# Altium PCB 28pins_PCB.PcbDoc (part 1 of 3)
Units mm, origin at the board's own origin, x right, y up, seen from the top; angles counter-clockwise.
Board outline 68.58 x 53.34 mm, 2 copper layers (L1, L2), stack 1.671 mm thick; 105 components, 73 nets, 323 pads, 83 vias.
Unrouted connection lines stored in the file: 1.
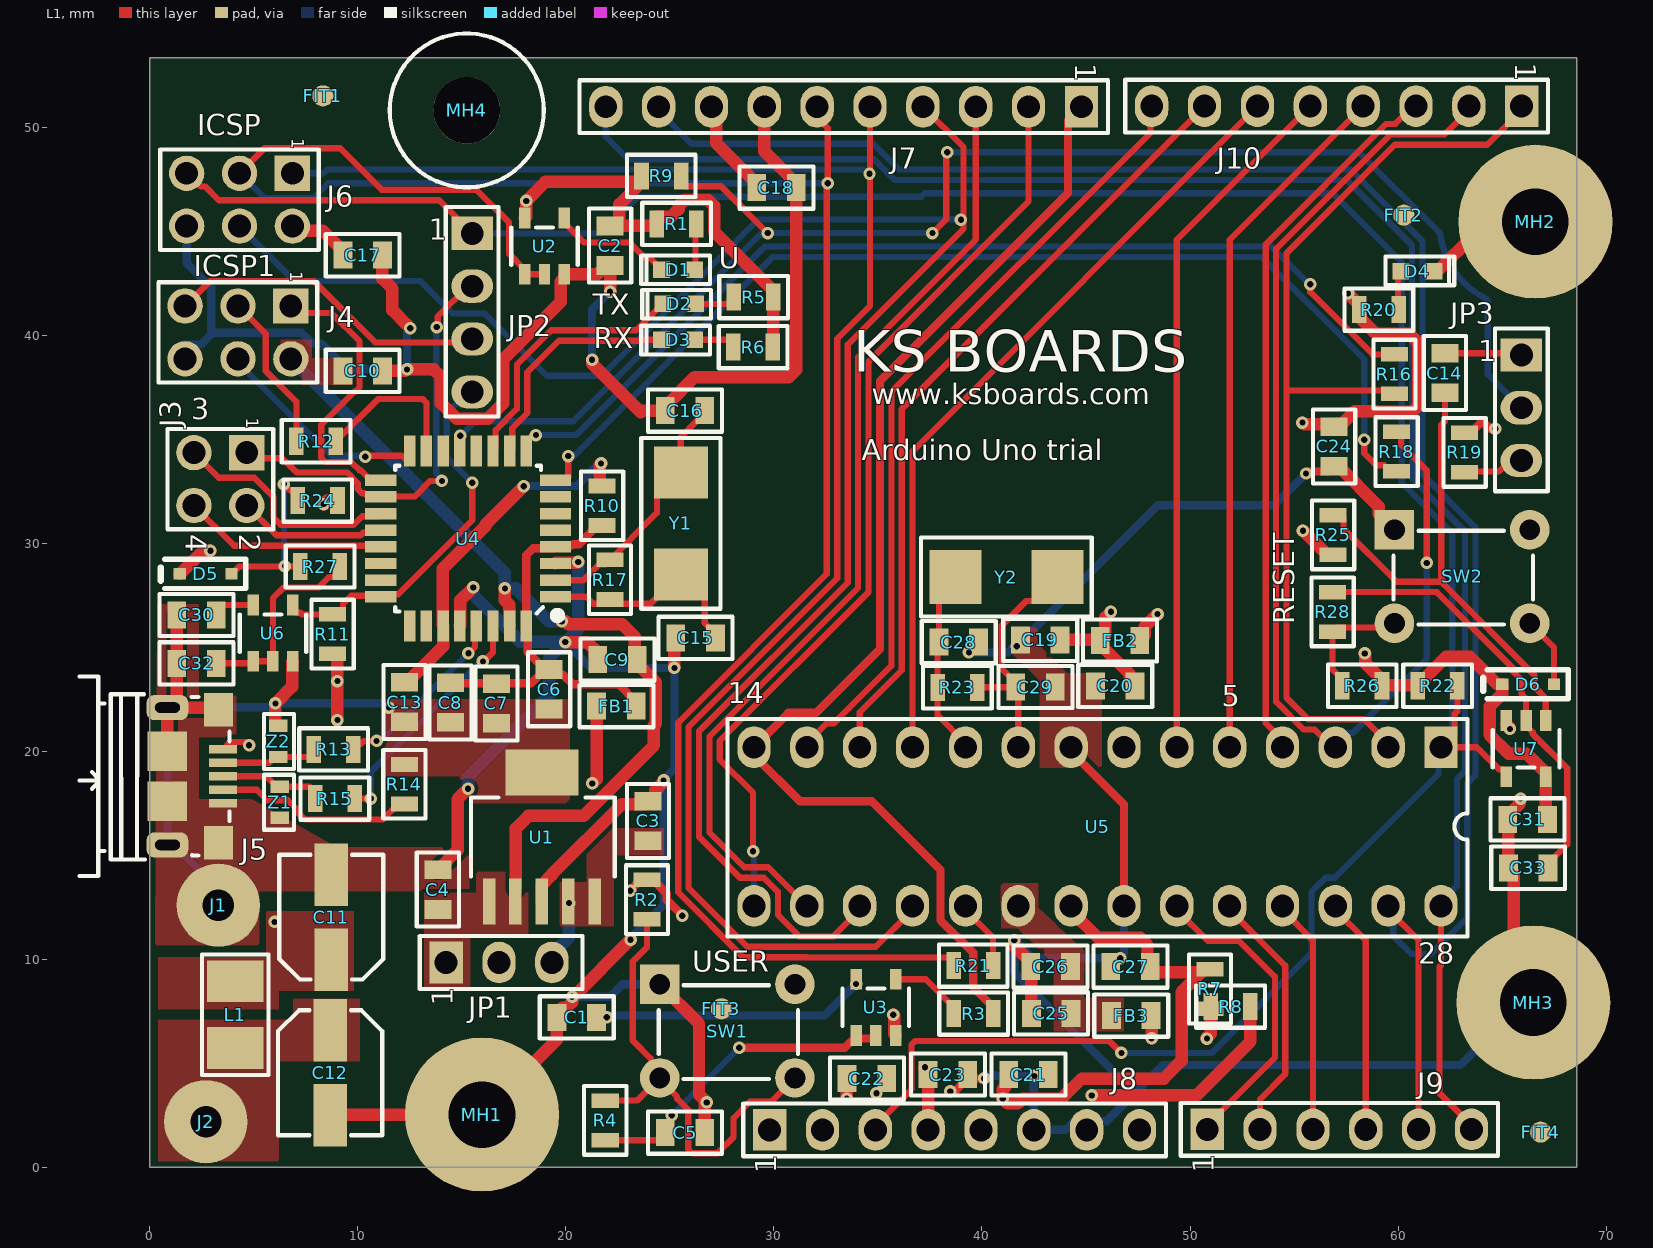
[diagram p0: L1 view]
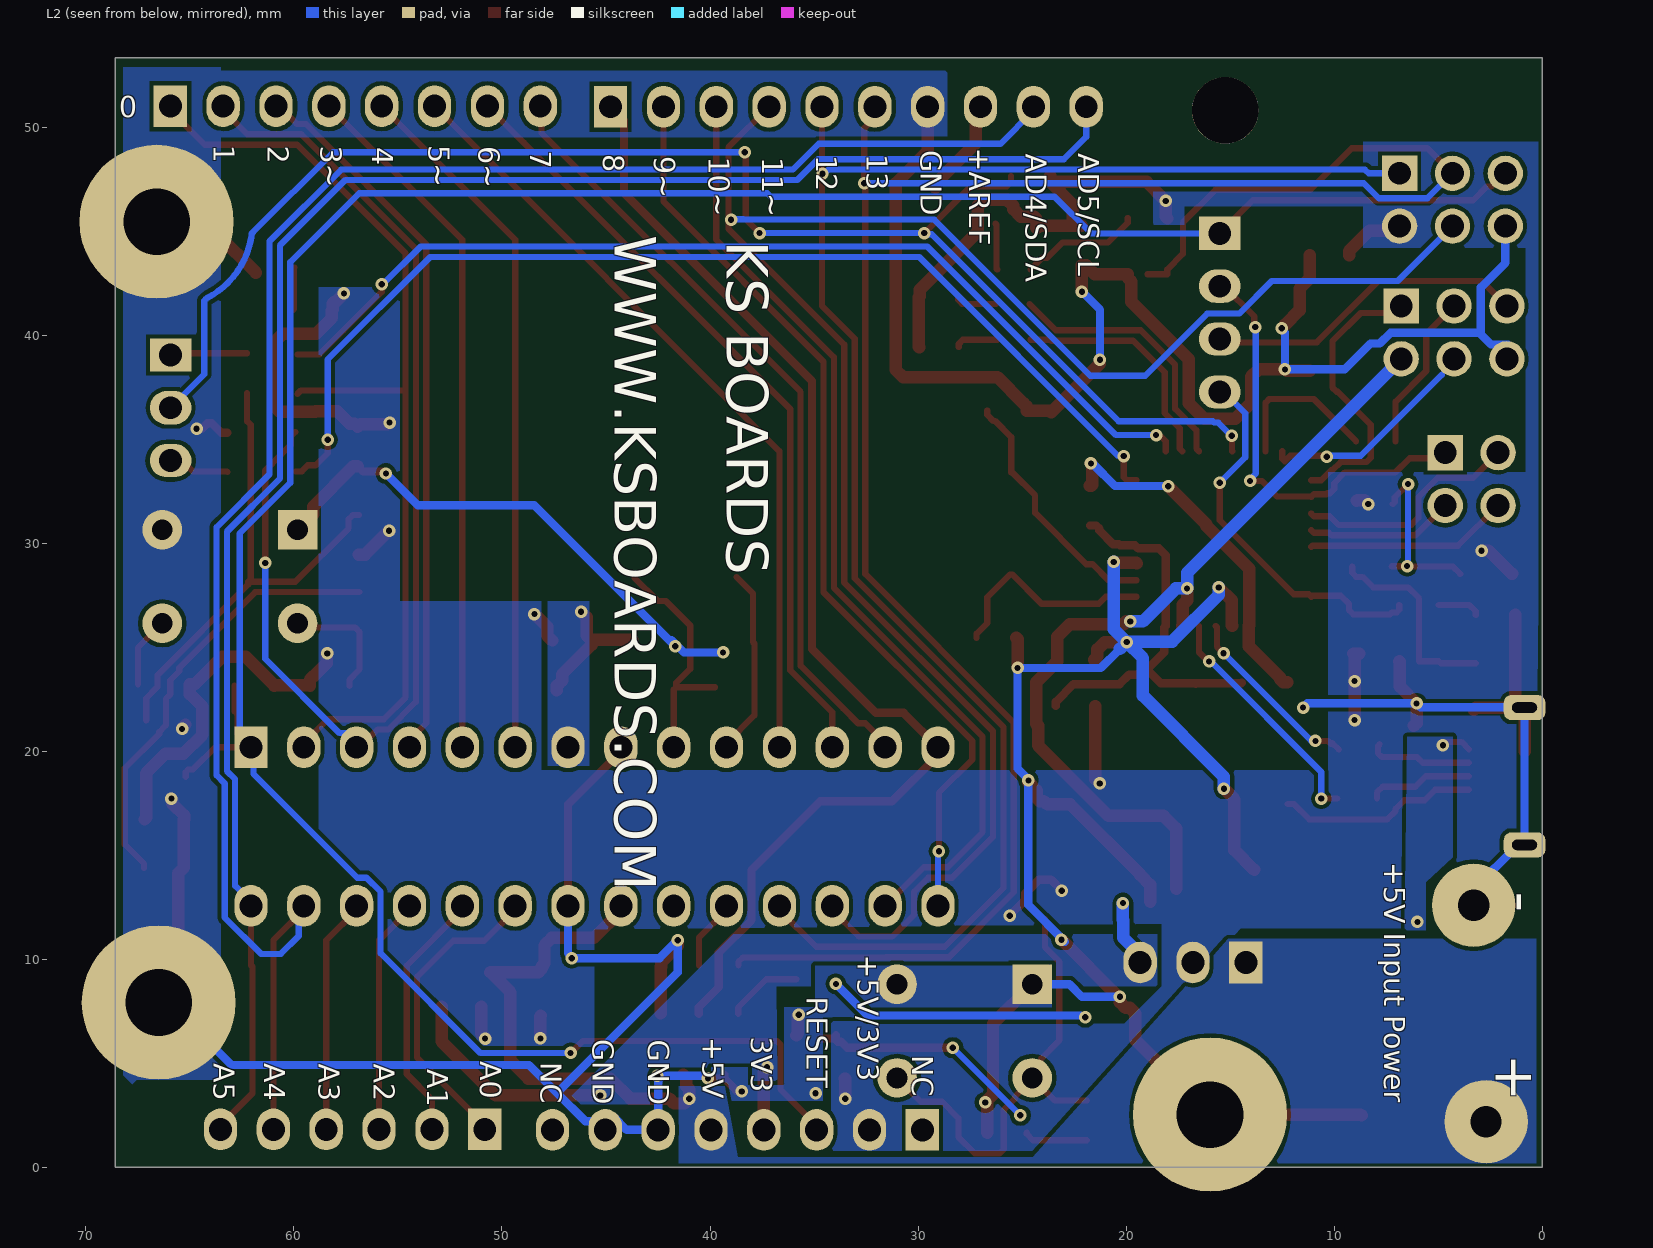
[diagram p1: L2 view, seen from below]

## Layer stack, top to bottom
Top Solder: solder mask 0.0102, Solder Resist, Dk 3.5
L1: signal copper 0.0356
Dielectric 1: dielectric 1.6, FR-4, Dk 4.8
L2: signal copper 0.0356
Bottom Solder: solder mask 0.0102, Solder Resist, Dk 3.5

## Board outline
0,0 68.58,0 68.58,53.34 0,53.34

## Design rules (kind name [scope] priority, off if disabled: settings)
Clearance [All] p1: gap=0.2 ignorepadtopadclearanceinfootprint=FALSE
ComponentClearance [All] p1: gap=0.2 collisioncheckmode=3 verticalgap=0.2 showdistances=FALSE
HoleSize [All] p1: absolutevalues=TRUE maxlimit=10 minlimit=0.2 maxpercent=80.000 minpercent=20.000
HoleToHoleClearance [All] p1: gap=0.3 allowstackedmicrovias=TRUE
MinimumSolderMaskSliver [All] p1: minsoldermaskwidth=0.1
PolygonConnect [All] p1: connectstyle=Direct reliefconductorwidth=0.254 reliefentries=4 polygonreliefangle="90 Angle" airgapwidth=0.254
RoutingVias [All] p1: holewidth=0.3 width=0.6 viastyle="Through Hole" minholewidth=0.3 minwidth=0.6 maxholewidth=0.3 maxwidth=0.6
SilkToSilkClearance [All] p1: silktosilkclearance=0.1
SilkToSolderMaskClearance [IsPad] p1: minsilkscreentomaskgap=0.1 clearancetoexposedcopper=TRUE
SolderMaskExpansion [All] p1: expansion=0.1 istentingtop=FALSE
Width "Width POWERS" [InNet('+*') or InNet('GND')] p1: maxlimit=4 minlimit=0.4 preferedwidth=0.4
Width [All] p2: maxlimit=0.5 minlimit=0.2 preferedwidth=0.3
24 further rules are at their usual default settings.

## Components (designator, comment, footprint, x,y, rotation, side; value= is the part's Value field where it differs from the comment)
C1 "100n" C0805 20.523,7.214 r0 top
C2 "100n" C0805 22.125,44.3 r90 top
C3 "10µF / 16V" C0805 23.95,16.65 r270 top
C4 "10µF / 16V" C0805 13.85,13.35 r270 top
C5 "100n" C0805 25.73,1.676 r180 top
C6 "10µF / 16V" C0805 19.2,22.983 r90 top
C7 "100n" C0805 16.663,22.297 r90 top
C8 "100n" C0805 14.449,22.339 r90 top
C9 "100n" C0805 22.479,24.409 r0 top
C10 "100n" C0805 10.236,38.278 r180 top
C11 "100uF/10V" C_ALU_C_SIZE 8.725,12.025 r90 top
C12 "100uF/10V" C_ALU_C_SIZE 8.675,4.55 r270 top
C13 "1uF/25V" C0805 12.249,22.364 r90 top
C14 "100n" C0805 62.25,38.175 r270 top
C15 "18p" C0805 26.238,25.451 r0 top
C16 "18p" C0805 25.73,36.373 r0 top
C17 "10µF / 16V" C0805 10.236,43.84 r180 top
C18 "10µF / 16V" C0805 30.124,47.092 r180 top
C19 "10µF / 16V" C0805 42.799,25.349 r0 top
C20 "100n" C0805 46.406,23.139 r0 top
C21 "100n" C0805 42.236,4.465 r180 top
C22 "100n" C0805 34.468,4.267 r180 top
C23 "100n" C0805 38.361,4.465 r180 top
C24 "10µF / 16V" C0805 56.925,34.65 r90 top
C25 "10µF / 16V" C0805 43.325,7.4 r0 top
C26 "100n" C0805 43.3,9.65 r0 top
C27 "100n" C0805 47.142,9.648 r0 top
C28 "18p" C0805 38.887,25.248 r180 top
C29 "18p" C0805 42.57,23.089 r180 top
C30 "100n" C0805 2.25,26.55 r0 top
C31 "100n" C0805 66.225,16.725 r0 top
C32 "100n" C0805 2.25,24.225 r0 top
C33 "100n" C0805 66.25,14.4 r0 top
D1 "GREEN" LED_0603 25.4,43.15 r0 top
D2 "Orange" LED_0603 25.45,41.5 r0 top
D3 "Orange" LED_0603 25.4,39.775 r0 top
D4 "GREEN" LED_0603 60.925,43.075 r180 top
D5 "BAT54HT1G" SOD323 2.667,28.524 r0 top
D6 "BAT54HT1G" SOD323 66.225,23.225 r0 top
FB1 "MPZ2012S601AT000" C0805 22.428,22.174 r0 top
FB2 "MPZ2012S601AT000" C0805 46.634,25.324 r180 top
FB3 "MPZ2012S601AT000" C0805 47.175,7.3 r180 top
FIT1 "FIT_1MM" FIT_40X120 8.325,51.5 r0 top
FIT2 "FIT_1MM" FIT_40X120 60.274,45.771 r90 top
FIT3 "FIT_1MM" FIT_40X120 27.475,7.625 r90 top
FIT4 "FIT_1MM" FIT_40X120 66.85,1.7 r90 top
J1 "4MMx1.5MM" PAD_WITH_HOLE_4MMX1.5MM 3.3,12.6 r90 top
J2 "4MMx1.5MM" PAD_WITH_HOLE_4MMX1.5MM 2.7,2.2 r0 top
J3 "HDR 2X2" HDR_2X2_2.54MM 4.665,34.35 r270 top
J4 "HDR 2x3" HDR_2X3_2.54MM 6.782,41.402 r270 top
J5 "10118193-0001LF" 10118193 3.53,20.1 r270 top locked
J6 "HDR 2x3" HDR_2X3_2.54MM 6.858,47.777 r270 top locked
J7 "HDR_female_1x10_2.54mm" HDR_FEMALE_1X10_2.54MM 44.78,50.978 r270 top locked
J8 "HDR female 1x8 2.54mm" HDR_FEMALE_1X8_2.54MM 29.794,1.803 r90 top locked
J9 "HDR_FEMALE_1x6_2.54mm" HDR_FEMALE_1X6_2.54MM 50.825,1.829 r90 top locked
J10 "HDR female 1x8 2.54mm" HDR_FEMALE_1X8_2.54MM 65.938,51.003 r270 top locked
JP1 "HDR 1x3" HDR_FEMALE_1X3_2.54MM 14.25,9.85 r90 top locked
JP2 "HDR 1x4" HDR_FEMALE_1X4_2.54MM 15.5,44.89 r0 top locked
JP3 "HDR 1x3" HDR_FEMALE_1X3_2.54MM 65.925,39.05 r0 top locked
L1 "2u2 / 2A" C1210_IND 4.115,7.341 r270 top
MH1 "MH_7.4MMC_3.4MMD" MH_7.4MMX3.2MM#1 13.97,2.54 r0 top locked
MH2 "MH_7.4MMC_3.4MMD" MH_7.4MMX3.2MM#2 66.6,45.45 r0 top
MH3 "MH_7.4MMC_3.4MMD" MH_7.4MMX3.2MM#2 66.5,7.925 r0 top
MH4 "MH_7.4MMNC_3.2MMD" MH_7.4MMC_3.2MMD_NON_COPPER_NPHT 15.24,50.8 r0 top locked
R1 "560R" R0805 25.325,45.35 r180 top
R2 "10k" R0805 23.9,12.875 r270 top
R3 "560R" R0805 39.599,7.391 r0 top
R4 "22R" R0805 21.895,2.261 r270 top
R5 "560R" R0805 29.025,41.825 r0 top
R6 "560R" R0805 29,39.425 r0 top
R7 "0R" R0805 50.958,8.576 r270 top
R8 "0R" R0805 51.95,7.725 r0 top
R9 "100k" R0805 24.587,47.65 r180 top
R10 "0R" R0805 21.742,31.801 r270 top
R11 "10k" R0805 8.788,25.629 r90 top
R12 "22R" R0805 8.001,34.9 r180 top
R13 "22R" R0805 8.839,20.091 r0 top
R14 "0R" R0805 12.243,18.415 r90 top
R15 "22R" R0805 8.9,17.725 r0 top
R16 "1k" R0805 59.825,38.125 r270 top
R17 "1M" R0805 22.123,28.245 r270 top
R18 "1k" R0805 59.925,34.4 r90 top
R19 "1k" R0805 63.195,34.366 r270 top
R20 "560R" R0805 59.075,41.225 r180 top
R21 "22R" R0805 39.583,9.703 r180 top
R22 "10k" R0805 61.9,23.15 r0 top
R23 "1M" R0805 38.815,23.075 r180 top
R24 "10k" R0805 8.075,32.05 r180 top
R25 "10k" R0805 56.875,30.4 r90 top
R26 "10k" R0805 58.275,23.15 r180 top
R27 "22R" R0805 8.189,28.88 r0 top
R28 "22R" R0805 56.85,26.7 r90 top
SW1 "1825910-6" 1825910-6 27.762,6.553 r90 top
SW2 "1825910-6" 1825910-6 63.075,28.4 r90 top
U1 "TL1963A-33DCQR" DCQ-R-PDSO-G6 18.85,15.875 r90 top
U2 "SN74AHC1G09DBVR" DBV_SOT_23 18.975,44.275 r90 top
U3 "SN74AHC1G09DBVR" DBV_SOT_23 34.9,7.696 r90 top
U4 "ATMEGA16U2-AU" TQFP32 15.3,30.225 r180 top locked
U5 "ATMEGA328P-PU" 28_DIP_7.62MM 62.065,20.193 r270 top locked
U6 "SN74AHC1G09DBVR" DBV_SOT_23 5.925,25.675 r90 top
U7 "SN74AHC1G09DBVR" DBV_SOT_23 66.15,20.125 r270 top
Y1 "ABM7-16.000MHZ-D2Y-T" ABM7_V1_1_BIG 25.527,30.949 r270 top
Y2 "ABM7-16.000MHZ-D2Y-T" ABM7_V1_1_BIG 41.173,28.372 r180 top
Z1 "CG0603MLC-05E" R0603 6.25,17.55 r90 top
Z2 "CG0603MLC-05E" R0603 6.175,20.475 r270 top

## Footprints (in the part's own frame and the unit in brackets; to place one, negate y for a bottom-side part, rotate by r counter-clockwise, add the part's x,y. Pads: shape width x height; smd on the part's side, far side on the other; paste and mask are expansions set on the pad)
28_DIP_7.62MM [mm]
  rect 2x1.6 hole 1.1: 1(0,0)
  oval 2x1.6 hole 1.1: 2(0,-2.54) 3(0,-5.08) 4(0,-7.62) 5(0,-10.16) 6(0,-12.7) 7(0,-15.24) 8(0,-17.78) 9(0,-20.32) 10(0,-22.86) 11(0,-25.4) 12(0,-27.94) 13(0,-30.48) 14(0,-33.02) 15(7.62,-33.02) 16(7.62,-30.48) 17(7.62,-27.94) 18(7.62,-25.4) 19(7.62,-22.86) 20(7.62,-20.32) 21(7.62,-17.78) 22(7.62,-15.24) 23(7.62,-12.7) 24(7.62,-10.16) 25(7.62,-7.62) 26(7.62,-5.08) 27(7.62,-2.54) 28(7.62,0)
  silkscreen extent -1.36,-34.29 9.1,1.27, body extent -0.14,-33.73 7.76,0.92, height 4.09
1825910-6 [mm]
  rect 1.9x1.9 hole 1: 1(2.25,3.25)
  round 1.9 hole 1: 2(2.25,-3.25) 3(-2.25,3.25) 4(-2.25,-3.25)
  silkscreen extent -2.3,-3.4 2.2,3.3, body extent -3,-3.9 2.99,3.9, height 5.01
10118193 [mm]
  rect 0.4x1.35 smd mask+0.05: 1(0,0) 2(0.65,0) 3(1.3,0) 4(1.95,0) 5(2.6,0)
  rect 1.6x1.4 smd: 6(-1.9,-0.225) 7(4.5,-0.225)
  rrect60% 1.2x2 hole 0.5 slot 1.2 at 90 deg: 8(-2,-2.675) 9(4.6,-2.675)
  rect 1.9x1.9 smd: 10(0.1,-2.675) 11(2.5,-2.675)
  silkscreen extent -3.5,-6.9 6.1,0.3, body extent -2.63,-5.41 5.23,0.3, height 2.86
ABM7_V1_1_BIG [mm]
  rect 2.5x2.6 smd: 1(-2.45,0) 2(2.45,0)
  silkscreen extent -4.1,-1.9 4.1,1.9, body extent -3,-1.75 3,1.75, height 1.41
C0805 [mm]
  rect 0.9x1.3 smd: 1(-0.95,0) 2(0.95,0)
  silkscreen extent -1.78,-1.02 1.78,1.02, body extent -1.13,-0.72 1.08,0.74, height 1.39
C1210_IND [mm]
  rect 2x2.7 smd: 1(-1.6,0) 2(1.6,0)
  silkscreen extent -2.9,-1.6 2.9,1.6, body extent -1.75,-1.3 1.95,1.3, height 2.8
C_ALU_C_SIZE [mm]
  rect 3x1.6 smd: 1(-2.05,0) 2(2.05,0)
  silkscreen extent -3,-2.5 3,2.5, body extent -2.82,-2.67 3.07,2.63, height 5.42
DBV_SOT_23 [mm]
  rect 1x0.55 smd: 1(-1.35,0.95) 2(-1.35,0) 3(-1.35,-0.95) 4(1.35,-0.95) 5(1.35,0.95)
  silkscreen extent -0.9,-1.6 0.9,1.6, body extent -1.44,-1.52 1.59,1.52, height 1.61
DCQ-R-PDSO-G6 [mm]
  rect 2.2x0.6 smd: 1(-3.1,2.54) 2(-3.1,1.27) 3(-3.1,0) 4(-3.1,-1.27) 5(-3.1,-2.54)
  rect 2.2x3.5 smd: 6(3.1,0)
  silkscreen extent -1.9,-3.5 1.9,3.4, body extent -3.86,-3.28 3.4,3.27, height 1.71
FIT_40X120 [mil]
  round 40 smd paste-40 mask+40: 1(0,0)
HDR_2X2_2.54MM [mm]
  rect 1.7x1.7 hole 1.1: 1(0,0)
  round 1.7 hole 1.1: 2(2.54,0) 3(0,-2.54) 4(2.54,-2.54)
  silkscreen extent -1.14,-3.81 3.68,1.27, body extent -1.14,-3.81 3.68,1.27, height 9.5
HDR_2X3_2.54MM [mm]
  rect 1.7x1.7 hole 1.1: 1(0,0)
  round 1.7 hole 1.1: 2(2.54,0) 3(0,-2.54) 4(2.54,-2.54) 5(0,-5.08) 6(2.54,-5.08)
  silkscreen extent -1.14,-6.35 3.68,1.27, body extent -1.27,-6.35 3.81,1.27, height 9.21
HDR_FEMALE_1X3_2.54MM [mm]
  rect 2x1.6 hole 1.1: 1(0,0)
  oval 2x1.6 hole 1.1: 2(0,-2.54) 3(0,-5.08)
  silkscreen extent -1.27,-6.55 1.27,1.27, body extent -1.23,-6.11 1.17,1.11, height 5.47
HDR_FEMALE_1X4_2.54MM [mm]
  rect 2x1.6 hole 1.1: 1(0,0)
  oval 2x1.6 hole 1.1: 2(0,-2.54) 3(0,-5.08) 4(0,-7.62)
  silkscreen extent -1.27,-8.8 1.27,1.27, body extent -1.18,-8.66 1.23,1.11, height 5.47
HDR_FEMALE_1X6_2.54MM [mm]
  rect 2x1.6 hole 1.1: 1(0,0)
  oval 2x1.6 hole 1.1: 2(0,-2.54) 3(0,-5.08) 4(0,-7.62) 5(0,-10.16) 6(0,-12.7)
  silkscreen extent -1.27,-13.97 1.27,1.27, body extent -1.23,-14.17 1.27,1.47, height 8.31
HDR_FEMALE_1X8_2.54MM [mm]
  rect 2x1.6 hole 1.1: 1(0,0)
  oval 2x1.6 hole 1.1: 2(0,-2.54) 3(0,-5.08) 4(0,-7.62) 5(0,-10.16) 6(0,-12.7) 7(0,-15.24) 8(0,-17.78)
  silkscreen extent -1.27,-19.05 1.27,1.27, body extent -1.23,-19.25 1.27,1.47, height 8.31
HDR_FEMALE_1X10_2.54MM [mm]
  rect 2x1.6 hole 1.1: 1(0,0)
  oval 2x1.6 hole 1.1: 2(0,-2.54) 3(0,-5.08) 4(0,-7.62) 5(0,-10.16) 6(0,-12.7) 7(0,-15.24) 8(0,-17.78) 9(0,-20.32) 10(0,-22.86)
  silkscreen extent -1.27,-24.13 1.27,1.27, body extent -1.23,-24.33 1.27,1.47, height 8.31
LED_0603 [mm]
  rect 0.8x0.8 smd: 1(-0.8,0) 2(0.8,0)
  silkscreen extent -1.78,-0.7 1.53,0.67, body extent -0.85,-0.4 0.85,0.4, height 0.66
MH_7.4MMC_3.2MMD_NON_COPPER_NPHT [mm]
  round 3.2 hole 3.2 unplated: 1(0,0)
  silkscreen extent -3.7,-3.7 3.7,3.7
MH_7.4MMX3.2MM#1 [mm]
  round 7.4 hole 3.2: 1(2,0)
MH_7.4MMX3.2MM#2 [mm]
  round 7.4 hole 3.2: 1(0,0)
PAD_WITH_HOLE_4MMX1.5MM [mm]
  round 4 hole 1.5: 1(0,0)
R0603 [mm]
  rect 0.6x0.9 smd: 1(-0.75,0) 2(0.75,0)
  silkscreen extent -1.32,-0.69 1.32,0.76, body extent -0.79,-0.42 0.81,0.42, height 0.81
R0805 [mm]
  rect 0.7x1.3 smd: 1(-0.95,0) 2(0.95,0)
  silkscreen extent -1.65,-1.02 1.65,1.02, body extent -1.03,-0.6 0.98,0.6, height 0.71
SOD323 [mil]
  rect 23x22 smd: 1(-48,0) 2(50,0)
  silkscreen extent -84,-28 77,28, body extent -48,-25 50,24, height 35
TQFP32 [mm]
  rect 1.5x0.55 smd mask+0.06: 1(-4.2,2.8) 2(-4.2,2) 3(-4.2,1.2) 4(-4.2,0.4) 5(-4.2,-0.4) 6(-4.2,-1.2) 7(-4.2,-2) 8(-4.2,-2.8) 17(4.2,-2.8) 18(4.2,-2) 19(4.2,-1.2) 20(4.2,-0.4) 21(4.2,0.4) 22(4.2,1.2) 23(4.2,2) 24(4.2,2.8)
  rect 0.55x1.5 smd mask+0.06: 9(-2.8,-4.2) 10(-2,-4.2) 11(-1.2,-4.2) 12(-0.4,-4.2) 13(0.4,-4.2) 14(1.2,-4.2) 15(2,-4.2) 16(2.8,-4.2) 25(2.8,4.2) 26(2,4.2) 27(1.2,4.2) 28(0.4,4.2) 29(-0.4,4.2) 30(-1.2,4.2) 31(-2,4.2) 32(-2.8,4.2)
  silkscreen extent -4.4,-3.5 3.5,3.8, body extent -4.72,-4.62 4.52,4.62, height 1.2

## Part data
C1 C2 C5 C7 C8 C9 C10 C14 C20 C21 C22 C23 C26 C27 C30 C31 C32 C33: library part C2012X7R1H104M085AA, "CAP CER 0.1UF 50V X7R 0805", Capacitance=100nF, Case Code (Imperial)=0805, Case Code (Metric)=2012, Dielectric=X7R, Dielectric Material=Ceramic, Manufacturer=TDK, Max Operating Temperature=125°C, Min Operating Temperature=-55°C, Package Quantity=1, Supplier Part Number 1=445-7535-1-ND, Tolerance=20%, Voltage Rating=50V, Case/Package=0805, Category="Ceramic Capacitors", ComponentLink1Description=https://datasheet.ciiva.com/6256/tdkmlcccaprange-6256917.pdf?src-supplier=Digi-Key, ComponentLink1URL=https://datasheet.ciiva.com/6256/tdkmlcccaprange-6256917.pdf?src-supplier=Digi-Key, ComponentLink2Description=https://datasheet.ciiva.com/6256/tdkmlcccaprange-6256919.pdf?src-supplier=Digi-Key, ComponentLink2URL=https://datasheet.ciiva.com/6256/tdkmlcccaprange-6256919.pdf?src-supplier=Digi-Key, Depth=1.25mm, Height=0.85mm, Lead Free="Lead Free", Length=2mm, Manufacturer Part Number=C2012X7R1H104M085AA, Mount="Surface Mount", Number of Pins=2, Packaging="Tape and Reel", Pricing 1="1=0,15000, 10=0,10400, 50=0,05900, 100=0,04880, 500=0,03422, 1000=0,02833 (USD)", REACH SVHC=Unknown, Resistor Type=Ceramic, RoHS=Yes, Stock 1=9653, Supplier 1=Digi-Key, Termination=SMD/SMT, Thickness=0.037inch, Voltage Rating (DC)=50V, Weight=0.000194oz, Width=0.049inch
C3 C4 C6 C17 C18 C19 C24 C25: library part C2012X5R1C106M125AC, "CERAMIC CAPACITOR, 10UF, 16V, X5R, 20%, 0805, FULL REEL; Product Range:C Series; Capacitance:10 F; Capacitance Tolerance: 20%; Dielectric Characteristic:X5R; Voltage Rating:16V; Ceramic Capacitor Case:0805 [2012 Metric]; MSL:- ;RoHS Compliant: Yes", Capacitance=10uF, Case Code (Imperial)=0805, Case Code (Metric)=2012, Dielectric=X5R, Dielectric Material=Ceramic, Manufacturer=TDK, Max Operating Temperature=85°C, Min Operating Temperature=-55°C, Package Quantity=1, Supplier Part Number 1=445-4115-2-ND, Tolerance=20%, Voltage Rating=16V, Case/Package=0805, Category="Ceramic Capacitors", ComponentLink1Description=https://datasheet.ciiva.com/6289/tdkmlcccaprange-6289238.pdf?src-supplier=Digi-Key, ComponentLink1URL=https://datasheet.ciiva.com/6289/tdkmlcccaprange-6289238.pdf?src-supplier=Digi-Key, ComponentLink2Description=https://datasheet.ciiva.com/22725/1913358-22725558.pdf?src-supplier=Element14, ComponentLink2URL=https://datasheet.ciiva.com/22725/1913358-22725558.pdf?src-supplier=Element14, ComponentLink3Description=https://datasheet.ciiva.com/6252/tdkmlcccaprange-6252105.pdf?src-supplier=Digi-Key, ComponentLink3URL=https://datasheet.ciiva.com/6252/tdkmlcccaprange-6252105.pdf?src-supplier=Digi-Key, ComponentLink4Description=https://datasheet.ciiva.com/6252/tdkmlcccaprange-6252108.pdf?src-supplier=Digi-Key, ComponentLink4URL=https://datasheet.ciiva.com/6252/tdkmlcccaprange-6252108.pdf?src-supplier=Digi-Key, ComponentLink5Description=https://datasheet.ciiva.com/23803/1796654-23803022.pdf?src-supplier=Newark, ComponentLink5URL=https://datasheet.ciiva.com/23803/1796654-23803022.pdf?src-supplier=Newark, Depth=1.25mm, Height=1.25mm, Lead Free="Lead Free", Length=2mm, Manufacturer Part Number=C2012X5R1C106M125AC, Mount="Surface Mount", Number of Pins=2, Packaging="Tape and Reel", REACH SVHC="No SVHC", Resistor Type=Ceramic, RoHS=Yes, Supplier 1=Digi-Key, Termination=SMD/SMT, Thickness=0.057inch, Voltage Rating (DC)=16V, Weight=0.000194oz, Width=0.049inch
C11 C12: library part EEE-1AA101WR, "Cap Aluminum 100uF 10V 20% (5 X 5.4mm) SMD 50mA 1000 hr 85°C T/R", Capacitance=100uF, Case/Package=Radial, Manufacturer=Panasonic, Max Operating Temperature=85°C, Min Operating Temperature=-40°C, Package Quantity=1, Ripple Current=50mA, Supplier Part Number 1=PCE3867CT-ND, Tolerance=20%, Voltage Rating=10V, Category="Aluminum Electrolytic Capacitors", ComponentLink1Description=https://datasheet.ciiva.com/26945/getdatasheetpartid-169213-26945071.pdf?src-supplier=Verical, ComponentLink1URL=https://datasheet.ciiva.com/26945/getdatasheetpartid-169213-26945071.pdf?src-supplier=Verical, ComponentLink2Description=https://datasheet.ciiva.com/2983/aba0000ce2-2983906.pdf?src-supplier=Avnet, ComponentLink2URL=https://datasheet.ciiva.com/2983/aba0000ce2-2983906.pdf?src-supplier=Avnet, ComponentLink3Description=https://datasheet.ciiva.com/30075/11aba0000ce2-30075303.pdf?src-supplier=Onlinecomponents.com, ComponentLink3URL=https://datasheet.ciiva.com/30075/11aba0000ce2-30075303.pdf?src-supplier=Onlinecomponents.com, ComponentLink4Description=https://datasheet.ciiva.com/16427/aba0000ce2-16427544.pdf?src-supplier=Future+Electronics, ComponentLink4URL=https://datasheet.ciiva.com/16427/aba0000ce2-16427544.pdf?src-supplier=Future+Electronics, ComponentLink5Description=https://datasheet.ciiva.com/14598/70255710-14598233.pdf?src-supplier=Allied+Electronics, ComponentLink5URL=https://datasheet.ciiva.com/14598/70255710-14598233.pdf?src-supplier=Allied+Electronics, ComponentLink6Description=https://datasheet.ciiva.com/14605/70255710-14605689.pdf?src-supplier=Allied+Electronics, ComponentLink6URL=https://datasheet.ciiva.com/14605/70255710-14605689.pdf?src-supplier=Allied+Electronics, ComponentLink7Description=https://datasheet.ciiva.com/11673/aba0000ce2-11673882.pdf?src-supplier=Avnet, ComponentLink7URL=https://datasheet.ciiva.com/11673/aba0000ce2-11673882.pdf?src-supplier=Avnet, ComponentLink8Description=https://datasheet.ciiva.com/24027/aba0000ce2-40801-24027541.pdf?src-supplier=Mouser, ComponentLink8URL=https://datasheet.ciiva.com/24027/aba0000ce2-40801-24027541.pdf?src-supplier=Mouser, Contact Plating=Tin, Diameter=5mm, Height=5.4mm, Height - Seated (Max)=0.213inch, Lead Free="Lead Free", Length=5.5mm, Life (Hours)=1000Hour, Manufacturer Part Number=EEE-1AA101WR, Mount="Surface Mount,PCB", Packaging="Tape and Reel", Pricing 1="1=0,34000, 10=0,23100, 50=0,15400, 100=0,13090, 500=0,09240 (USD)", Radiation Hardening=No, REACH SVHC=Unknown, Ripple Current (AC)=50mA, RoHS=Yes, Stock 1=120840, Supplier 1=Digi-Key, Termination=SMD/SMT, Voltage Rating (DC)=10V
C13: library part C2012X5R1E105K125AA, "TDK - C2012X5R1E105K125AA - SMD Multilayer Ceramic Capacitor, 1 µF, 25 V, 0805 [2012 Metric], ± 10%, X5R, C Series", Capacitance=1uF, Case Code (Imperial)=0805, Case Code (Metric)=2012, Dielectric=X5R, Dielectric Material=Ceramic, Manufacturer=TDK, Max Operating Temperature=85°C, Min Operating Temperature=-55°C, Package Quantity=2000, Supplier Part Number 1=445-1419-1-ND, Tolerance=10%, Voltage=25V, Case/Package=0805, Category="Ceramic Capacitors", ComponentLink1Description=https://datasheet.ciiva.com/11787/0900766b80c1bb00-11787608.pdf?src-supplier=RSComponents, ComponentLink1URL=https://datasheet.ciiva.com/11787/0900766b80c1bb00-11787608.pdf?src-supplier=RSComponents, ComponentLink2Description=https://datasheet.ciiva.com/16449/e412-c-16449595.pdf?src-supplier=Future+Electronics, ComponentLink2URL=https://datasheet.ciiva.com/16449/e412-c-16449595.pdf?src-supplier=Future+Electronics, ComponentLink3Description=https://datasheet.ciiva.com/28602/1744655-28602171.pdf?src-supplier=Element14, ComponentLink3URL=https://datasheet.ciiva.com/28602/1744655-28602171.pdf?src-supplier=Element14, ComponentLink4Description=https://datasheet.ciiva.com/15192/getdatasheetpartid-726707-15192140.pdf?src-supplier=Verical, ComponentLink4URL=https://datasheet.ciiva.com/15192/getdatasheetpartid-726707-15192140.pdf?src-supplier=Verical, Depth=1.25mm, Height=1.25mm, Lead Free="Lead Free", Length=2mm, Manufacturer Part Number=C2012X5R1E105K125AA, Mount="Surface Mount", Number of Pins=2, Packaging="Tape and Reel", Pricing 1="1=0,23000, 10=0,15800, 50=0,09500, 100=0,08030, 500=0,05492, 1000=0,04858 (USD)", Radiation Hardening=No, REACH SVHC="No SVHC", Resistor Type=Ceramic, RoHS=Yes, Stock 1=31037, Supplier 1=Digi-Key, Termination=SMD/SMT, Thickness=0.057inch, Voltage Rating=25V, Voltage Rating (DC)=25V, Weight=0.000194oz, Width=0.049inch
C15 C16 C28 C29: library part C0805C180J5GAC7210, "Cap Ceramic 18pF 50V C0G 5% SMD 0805 125C Plastic T/R", Capacitance=18pF, Case/Package=0805, Dielectric=C0G, Dielectric Material=Ceramic, Manufacturer=KEMET, Max Operating Temperature=125°C, Min Operating Temperature=-55°C, Supplier Part Number 1=399-C0805C180J5GAC7210CT-ND, Tolerance=5%, Voltage Rating (DC)=50V, Category="Ceramic Capacitors", ComponentLink1Description=http://components.arrow.com/part/dataview/0323_00325677?src-supplier=Arrow+Europe, ComponentLink1URL=http://components.arrow.com/part/dataview/0323_00325677?src-supplier=Arrow+Europe, Depth=1.25mm, Lead Free="Lead Free", Length=2mm, Manufacturer Part Number=C0805C180J5GAC7210, Packaging="Tape and Reel", Pricing 1="1=0,12000, 10=0,08600, 50=0,04900, 100=0,04070, 500=0,02852, 1000=0,02361, 2500=0,02197, 5000=0,02010 (USD)", RoHS=Yes, Stock 1=14815, Supplier 1=Digi-Key
D1 D4: library part LGL29K-G2J1-24-Z, "LED Uni-Color Green 572nm 2-Pin Chip 0603(1608Metric) T/R", Case Code (Imperial)=0603, Case Code (Metric)=1608, Color=Green, Forward Current=20mA, Forward Voltage=2.2V, Lens Color=White, Manufacturer="Osram Opto", Max Operating Temperature=100°C, Min Operating Temperature=-40°C, Package Quantity=5000, Reverse Voltage=12V, Supplier Part Number 1=475-2709-1-ND, Test Current=2mA, Case/Package=0603, Category=Uncategorized, ComponentLink1Description=https://datasheet.ciiva.com/4689/g-l29k-39844-4689584.pdf?src-supplier=Mouser, ComponentLink1URL=https://datasheet.ciiva.com/4689/g-l29k-39844-4689584.pdf?src-supplier=Mouser, ComponentLink2Description=https://datasheet.ciiva.com/15198/getdatasheetpartid-571127-15198411.pdf?src-supplier=Verical, ComponentLink2URL=https://datasheet.ciiva.com/15198/getdatasheetpartid-571127-15198411.pdf?src-supplier=Verical, ComponentLink3Description=https://datasheet.ciiva.com/2112/00077107-0-2112886.pdf?src-supplier=Digi-Key, ComponentLink3URL=https://datasheet.ciiva.com/2112/00077107-0-2112886.pdf?src-supplier=Digi-Key, ComponentLink4Description=https://datasheet.ciiva.com/2112/00077107-0-2112887.pdf?src-supplier=Digi-Key, ComponentLink4URL=https://datasheet.ciiva.com/2112/00077107-0-2112887.pdf?src-supplier=Digi-Key, ComponentLink5Description=https://datasheet.ciiva.com/2112/00077107-0-2112888.pdf?src-supplier=Digi-Key, ComponentLink5URL=https://datasheet.ciiva.com/2112/00077107-0-2112888.pdf?src-supplier=Digi-Key, Depth=0.8mm, Dominant Wavelength=570nm, Height=0.65mm, Illumination Color=Green, Length=1.3mm, Lens Size=0.8mm, Lens Style=Flat,Diffused,Colorless,Rectangular, Lens Transparency=Diffused, Luminous Flux=0.012lm, Luminous Intensity=5.6mcd, Manufacturer Part Number=LGL29K-G2J1-24-Z, Mount="Surface Mount", Number of Elements=1, Number of LEDs=1, Number of Pins=2, Packaging="Tape and Reel", Pricing 1="1=0,47000, 10=0,30800, 100=0,20530, 500=0,14198, 1000=0,11832, 2000=0,10649 (USD)", Radiation Hardening=No, RoHS=Yes, Stock 1=191201, Supplier 1=Digi-Key, Viewing Angle=160°, Width=0.8mm
D2 D3: library part LOL29K-H2K1-24-Z, "OSRAM - LO L29K-H2K1-24-Z - SMARTLED 0603 ORANGE", Case Code (Imperial)=0603, Case Code (Metric)=1608, Forward Current=20mA, Forward Voltage=2.2V, Lens Color=White, Manufacturer="Osram Opto", Max Operating Temperature=100°C, Min Operating Temperature=-40°C, Package Quantity=5000, Reverse Voltage=12V, Supplier Part Number 1=475-2740-2-ND, Test Current=2mA, Case/Package=0603, Category=Uncategorized, Color=Orange, ComponentLink1Description=https://datasheet.ciiva.com/2112/00077105-0-2112904.pdf?src-supplier=Digi-Key, ComponentLink1URL=https://datasheet.ciiva.com/2112/00077105-0-2112904.pdf?src-supplier=Digi-Key, ComponentLink2Description=https://datasheet.ciiva.com/2112/00077105-0-2112905.pdf?src-supplier=Digi-Key, ComponentLink2URL=https://datasheet.ciiva.com/2112/00077105-0-2112905.pdf?src-supplier=Digi-Key, ComponentLink3Description=https://datasheet.ciiva.com/2112/00077105-0-2112906.pdf?src-supplier=Digi-Key, ComponentLink3URL=https://datasheet.ciiva.com/2112/00077105-0-2112906.pdf?src-supplier=Digi-Key, ComponentLink4Description=https://datasheet.ciiva.com/15198/getdatasheetpartid-693885-15198412.pdf?src-supplier=Verical, ComponentLink4URL=https://datasheet.ciiva.com/15198/getdatasheetpartid-693885-15198412.pdf?src-supplier=Verical, Depth=0.8mm, Dominant Wavelength=606nm, Height=0.65mm, Illumination Color=Orange, Length=1.3mm, Lens Size=0.8mm, Lens Style=Flat,Diffused,Colorless,Rectangular, Lens Transparency=Diffused, Luminous Flux=0.025lm, Luminous Intensity=9mcd, Manufacturer Part Number=LOL29K-H2K1-24-Z, Mount="Surface Mount", Number of Elements=1, Number of LEDs=1, Number of Pins=2, Packaging="Tape and Reel", Radiation Hardening=No, RoHS=Yes, Supplier 1=Digi-Key, Viewing Angle=160°, Width=0.8mm
D5 D6: "Small Signal Schottky Diode, Single, 30 V, 200 mA, 800 mV, 600 mA, 150 C ;RoHS Compliant: Yes", Average Rectified Current=200mA, Capacitance=10pF, Forward Voltage=800mV, Manufacturer="ON Semiconductor / Fairchild", Max Forward Surge Current (Ifsm)=600mA, Max Operating Temperature=150°C, Max Repetitive Reverse Voltage (Vrrm)=30V, Max Reverse Current=2uA, Min Operating Temperature=-55°C, Package Quantity=3000, Power Dissipation=200mW, Supplier Part Number 1=BAT54HT1GOSCT-ND, Category="Schottky Diodes", ComponentLink1Description=https://datasheet.ciiva.com/4452/bat54ht1g-104602-4452889.pdf?src-supplier=Mouser, ComponentLink1URL=https://datasheet.ciiva.com/4452/bat54ht1g-104602-4452889.pdf?src-supplier=Mouser, ComponentLink2Description=https://datasheet.ciiva.com/1240/1747983-1240762.pdf?src-supplier=Newark, ComponentLink2URL=https://datasheet.ciiva.com/1240/1747983-1240762.pdf?src-supplier=Newark, ComponentLink3Description=https://datasheet.ciiva.com/34301/806549-34301562.pdf?src-supplier=Jameco, ComponentLink3URL=https://datasheet.ciiva.com/34301/806549-34301562.pdf?src-supplier=Jameco, ComponentLink4Description=https://datasheet.ciiva.com/30479/0900766b811a63a9-30479442.pdf?src-supplier=RSComponents, ComponentLink4URL=https://datasheet.ciiva.com/30479/0900766b811a63a9-30479442.pdf?src-supplier=RSComponents, ComponentLink5Description=https://datasheet.ciiva.com/4714/bat54ht1-d-72881-4714706.pdf?src-supplier=Mouser, ComponentLink5URL=https://datasheet.ciiva.com/4714/bat54ht1-d-72881-4714706.pdf?src-supplier=Mouser, ComponentLink6Description=https://datasheet.ciiva.com/910/bat54ht1g-910498.pdf?src-supplier=Digi-Key, ComponentLink6URL=https://datasheet.ciiva.com/910/bat54ht1g-910498.pdf?src-supplier=Digi-Key, ComponentLink7Description=https://datasheet.ciiva.com/46429/1727620-46429206.pdf?src-supplier=Element14, ComponentLink7URL=https://datasheet.ciiva.com/46429/1727620-46429206.pdf?src-supplier=Element14, ComponentLink8Description=https://datasheet.ciiva.com/915/bat54ht1-d-915444.pdf?src-supplier=Digi-Key, ComponentLink8URL=https://datasheet.ciiva.com/915/bat54ht1-d-915444.pdf?src-supplier=Digi-Key, ComponentLink9Description=https://datasheet.ciiva.com/910/bat54ht1g-910499.pdf?src-supplier=Digi-Key, ComponentLink9URL=https://datasheet.ciiva.com/910/bat54ht1g-910499.pdf?src-supplier=Digi-Key, ComponentLink10Description=https://datasheet.ciiva.com/8303/bat54ht1g-8303645.pdf?src-supplier=Avnet, ComponentLink10URL=https://datasheet.ciiva.com/8303/bat54ht1g-8303645.pdf?src-supplier=Avnet, ComponentLink11Description=https://datasheet.ciiva.com/1180/bat54ht1-d-1180251.pdf?src-supplier=Element14, ComponentLink11URL=https://datasheet.ciiva.com/1180/bat54ht1-d-1180251.pdf?src-supplier=Element14, ComponentLink12Description=https://datasheet.ciiva.com/1180/bat54ht1-d-1180252.pdf?src-supplier=Element14, ComponentLink12URL=https://datasheet.ciiva.com/1180/bat54ht1-d-1180252.pdf?src-supplier=Element14, ComponentLink13Description=https://datasheet.ciiva.com/8294/bat54ht1-d-8294645.pdf?src-supplier=Avnet, ComponentLink13URL=https://datasheet.ciiva.com/8294/bat54ht1-d-8294645.pdf?src-supplier=Avnet, ComponentLink14Description=https://datasheet.ciiva.com/915/bat54ht1-d-915445.pdf?src-supplier=Digi-Key, ComponentLink14URL=https://datasheet.ciiva.com/915/bat54ht1-d-915445.pdf?src-supplier=Digi-Key, ComponentLink15Description=https://datasheet.ciiva.com/915/bat54ht1-d-915443.pdf?src-supplier=Digi-Key, ComponentLink15URL=https://datasheet.ciiva.com/915/bat54ht1-d-915443.pdf?src-supplier=Digi-Key, ComponentLink16Description=https://datasheet.ciiva.com/910/bat54ht1g-910497.pdf?src-supplier=Digi-Key, ComponentLink16URL=https://datasheet.ciiva.com/910/bat54ht1g-910497.pdf?src-supplier=Digi-Key, ComponentLink17Description=https://datasheet.ciiva.com/17020/bat54ht1g-17020445.pdf?src-supplier=Future+Electronics, ComponentLink17URL=https://datasheet.ciiva.com/17020/bat54ht1g-17020445.pdf?src-supplier=Future+Electronics, ComponentLink18Description=https://datasheet.ciiva.com/48686/001262925-da-01-en-diode-schottky-30v-bat54ht1g-sod-323-fsc-48686266.pdf?src-supplier=Conrad, ComponentLink18URL=https://datasheet.ciiva.com/48686/001262925-da-01-en-diode-schottky-30v-bat54ht1g-sod-323-fsc-48686266.pdf?src-supplier=Conrad, Contact Plating=Tin,Matte, Current Rating=200mA, Element Configuration=Single, Forward Current=200mA, Height=1mm, Lead Free="Lead Free", Length=1.8mm, Manufacturer Part Number=BAT54HT1G, Max Reverse Leakage Current=2uA, Max Reverse Voltage (DC)=30V, Max Surge Current=600mA, Mount="Surface Mount", Number of Pins=2, Output Current=200mA, Packaging="Tape and Reel", Peak Non-Repetitive Surge Current=600mA, Polarity=Standard, Pricing 1="1=0,20000, 10=0,18100, 100=0,07590, 500=0,05962, 1000=0,04140 (USD)", Radiation Hardening=No, REACH SVHC="No SVHC", Recovery Time=5ns, Reverse Recovery Time=5ns, Reverse Voltage=30V, RoHS=Yes, Stock 1=238317, Supplier 1=Digi-Key, Voltage Rating (DC)=30V, Width=1.35mm
FB1 FB2 FB3: "FERRITE BEAD 600 OHM 0805 1LN", Case Code (Imperial)=0805, Case Code (Metric)=2012, Current Rating=2A, DC Resistance (DCR)=100mR, Manufacturer=TDK, Package Quantity=1, Supplier Part Number 1=445-2206-1-ND, Case/Package=0805, Category="Ferrite Beads and Chips", ComponentLink1Description=https://datasheet.ciiva.com/46634/beads-commercial-power-mpz-en-46634377.pdf?src-supplier=Digi-Key, ComponentLink1URL=https://datasheet.ciiva.com/46634/beads-commercial-power-mpz-en-46634377.pdf?src-supplier=Digi-Key, ComponentLink2Description=https://datasheet.ciiva.com/46634/beads-commercial-power-mpz-en-46634606.pdf?src-supplier=Digi-Key, ComponentLink2URL=https://datasheet.ciiva.com/46634/beads-commercial-power-mpz-en-46634606.pdf?src-supplier=Digi-Key, ComponentLink3Description=https://datasheet.ciiva.com/46634/beads-commercial-power-mpz-en-46634335.pdf?src-supplier=Digi-Key, ComponentLink3URL=https://datasheet.ciiva.com/46634/beads-commercial-power-mpz-en-46634335.pdf?src-supplier=Digi-Key, Height=0.041inch, Impedance=600R, Lead Free="Lead Free", Length=0.079inch, Manufacturer Part Number=MPZ2012S601AT000, Max DC Current=2A, Mount="Surface Mount", Packaging="Tape and Reel", Pricing 1="1=0,11000, 10=0,09200, 25=0,08240, 50=0,06040, 100=0,05220, 250=0,04116, 500=0,03478, 1000=0,02928 (USD)", REACH SVHC="No SVHC", RoHS=Yes, Stock 1=273606, Supplier 1=Digi-Key, Width=0.049inch
FIT1 FIT2 FIT3 FIT4: "fiducial 40 mil  Diameter 120 mil Mask"
J1 J2: library part PAD_WITH_HOLE_4mm_1.5mm, "Pad with hole 4mm x 1.5mm"
J3: library part 929665-02-18-EU, "Headers & Wire Housings 36 PS/2R/SRT/.235 .210/ALL 10U/ROHS", Color=Black, Current Rating=2.5A, Manufacturer=3M, Package Quantity=300, Supplier Part Number 1=3M156317-36-ND, Voltage Rating=1.5kV, Category="Headers and Wire Housings", ComponentLink1Description=https://datasheet.ciiva.com/6821/ts0769-6821293.pdf?src-supplier=Digi-Key, ComponentLink1URL=https://datasheet.ciiva.com/6821/ts0769-6821293.pdf?src-supplier=Digi-Key, Connector Type="Male Pin", Contact Gender=Male, Contact Material="Copper Alloy", Contact Mating Length=0.235inch, Contact Plating=Gold, Gender=Male, Manufacturer Part Number=929665-02-18-EU, Mount="Through Hole", Number of Positions=36, Number of Rows=2, Packaging=Bulk, Pitch=0.1inch, Pricing 1="1=6,01000, 10=5,77200, 25=5,29040, 50=5,05000, 100=4,80960, 250=4,20840, 500=4,08816 (USD)", RoHS=Yes, Row Spacing=0.1inch, Supplier 1=Digi-Key, Termination=Solder
J4 J6: library part 67997-106HLF, "CONN HEADER 6POS .100 STR 30AU", Color=Black, Current Rating=3A, Flammability Rating="UL94 V-0", Insulation Resistance=5GR, Manufacturer="Amphenol FCI", Max Operating Temperature=125°C, Max Voltage Rating (AC)=1.5kV, Min Operating Temperature=-65°C, Package Quantity=100, Supplier Part Number 1=609-3393-ND, Category="Headers and Wire Housings", ComponentLink1Description=https://datasheet.ciiva.com/5153/67996-222463-5153820.pdf?src-supplier=Mouser, ComponentLink1URL=https://datasheet.ciiva.com/5153/67996-222463-5153820.pdf?src-supplier=Mouser, ComponentLink2Description=https://datasheet.ciiva.com/16726/67996-16726286.pdf?src-supplier=Avnet+Europe, ComponentLink2URL=https://datasheet.ciiva.com/16726/67996-16726286.pdf?src-supplier=Avnet+Europe, ComponentLink3Description=https://datasheet.ciiva.com/722/67996-722044.pdf?src-supplier=Digi-Key, ComponentLink3URL=https://datasheet.ciiva.com/722/67996-722044.pdf?src-supplier=Digi-Key, ComponentLink4Description=https://datasheet.ciiva.com/10149/67996-10149221.pdf?src-supplier=Avnet, ComponentLink4URL=https://datasheet.ciiva.com/10149/67996-10149221.pdf?src-supplier=Avnet, ComponentLink5Description=https://datasheet.ciiva.com/46393/1876884-46393067.pdf?src-supplier=Element14, ComponentLink5URL=https://datasheet.ciiva.com/46393/1876884-46393067.pdf?src-supplier=Element14, Connector Type="Male Pin", Contact Gender=Male, Contact Material=Bronze, Contact Mating Length=0.23inch, Contact Plating=Gold,GXT, Contact Post Length=3.05mm, Depth=4.83mm, Gender=Male, Housing Color=Black, Housing Material=Thermoplastic, Lead Free="Lead Free", Length=7.62mm, Manufacturer Part Number=67997-106HLF, Mount="Through Hole", Number of Contacts=6, Number of Positions=6, Number of Rows=2, Orientation=Straight, Packaging=Bulk, Pitch=2.54mm, Pricing 1="1=1,78000, 10=1,61400, 100=1,38370, 500=1,15308, 1000=0,98835, 5000=0,87634, 10000=0,85657 (USD)", Radiation Hardening=No, REACH SVHC="No SVHC", RoHS=Yes, Row Spacing=0.1inch, Stock 1=1303, Supplier 1=Digi-Key, Termination="Through Hole", Voltage Rating=1.5kV
J5: "CONN USB MICRO B RECPT SMT R/A", Color=Black, Current Rating=1.8A, Flammability Rating="UL94 V-0", Insulation Resistance=1GR, Manufacturer="Amphenol FCI", Max Operating Temperature=85°C, Max Voltage Rating (AC)=100V, Min Operating Temperature=-55°C, Package Quantity=1200, Supplier Part Number 1=609-4616-1-ND, Category="USB Connectors", ComponentLink1Description=https://datasheet.ciiva.com/851/10118193-851106.pdf?src-supplier=Digi-Key, ComponentLink1URL=https://datasheet.ciiva.com/851/10118193-851106.pdf?src-supplier=Digi-Key, ComponentLink2Description=https://datasheet.ciiva.com/26853/getdatasheetpartid-418618-26853893.pdf?src-supplier=Verical, ComponentLink2URL=https://datasheet.ciiva.com/26853/getdatasheetpartid-418618-26853893.pdf?src-supplier=Verical, ComponentLink3Description=https://datasheet.ciiva.com/4598/10118193ac-197151-4598799.pdf?src-supplier=Mouser, ComponentLink3URL=https://datasheet.ciiva.com/4598/10118193ac-197151-4598799.pdf?src-supplier=Mouser, ComponentLink4Description=https://datasheet.ciiva.com/14802/10118193-0001lf-webpage-14802386.pdf?src-supplier=Arrow+Electronics, ComponentLink4URL=https://datasheet.ciiva.com/14802/10118193-0001lf-webpage-14802386.pdf?src-supplier=Arrow+Electronics, ComponentLink5Description=https://datasheet.ciiva.com/851/10118193-851107.pdf?src-supplier=Digi-Key, ComponentLink5URL=https://datasheet.ciiva.com/851/10118193-851107.pdf?src-supplier=Digi-Key, ComponentLink6Description=https://datasheet.ciiva.com/851/10118193-851108.pdf?src-supplier=Digi-Key, ComponentLink6URL=https://datasheet.ciiva.com/851/10118193-851108.pdf?src-supplier=Digi-Key, ComponentLink7Description=https://datasheet.ciiva.com/14618/70236827-14618887.pdf?src-supplier=Allied+Electronics, ComponentLink7URL=https://datasheet.ciiva.com/14618/70236827-14618887.pdf?src-supplier=Allied+Electronics, Connector Type=USB,Receptacle, Contact Material="Copper Alloy", Contact Plating=Gold, Depth=5.67mm, Features=Shielded, Gender=Female, Housing Material=Polymer, Length=7.86mm, Manufacturer Part Number=10118193-0001LF, Mount="Surface Mount,Horizontal", Number of Contacts=5, Number of Ports=1, Number of Terminals/Pins=5, Orientation="Right Angle", Packaging="Tape and Reel", Pitch=0.65mm, Pricing 1="1=0,45000, 10=0,43000, 25=0,36840, 50=0,31320, 100=0,30090, 250=0,27016, 500=0,25788 (USD)", Radiation Hardening=No, RoHS=Yes, Stock 1=68220, Supplier 1=Digi-Key, Termination=Solder, Voltage Rating=100V
J7: library part 66951-010LF, "CONN RCPT 10POS 0.1 GOLD PCB", Color=Black, Contact Resistance=15mR, Current Rating=3A, Manufacturer="Amphenol FCI", Max Operating Temperature=125°C, Max Voltage Rating (AC)=1.25kV, Min Operating Temperature=-65°C, Package Quantity=23, Supplier Part Number 1=609-2240-ND, Category="Headers and Wire Housings", ComponentLink1Description=https://datasheet.ciiva.com/746/66951-746016.pdf?src-supplier=Digi-Key, ComponentLink1URL=https://datasheet.ciiva.com/746/66951-746016.pdf?src-supplier=Digi-Key, ComponentLink2Description=https://datasheet.ciiva.com/5155/66951-85357-5155344.pdf?src-supplier=Mouser, ComponentLink2URL=https://datasheet.ciiva.com/5155/66951-85357-5155344.pdf?src-supplier=Mouser, ComponentLink3Description=https://datasheet.ciiva.com/10137/66951-10137498.pdf?src-supplier=Avnet, ComponentLink3URL=https://datasheet.ciiva.com/10137/66951-10137498.pdf?src-supplier=Avnet, ComponentLink4Description=https://datasheet.ciiva.com/16727/66951-16727150.pdf?src-supplier=Avnet+Europe, ComponentLink4URL=https://datasheet.ciiva.com/16727/66951-16727150.pdf?src-supplier=Avnet+Europe, Connector Type=Receptacle,Socket, Contact Gender=Female, Contact Material=Copper,Brass, Contact Plating=Gold, Depth=5.08mm, Gender=Female, Housing Color=Black, Housing Material=Thermoplastic, Lead Free="Lead Free", Length=25.4mm, Manufacturer Part Number=66951-010LF, Mount="Through Hole", Number of Contacts=10, Number of Positions=10, Number of Rows=1, Orientation=Straight, Packaging=Rail/Tube, Pitch=2.54mm, Pricing 1="1=2,02000, 10=1,83400, 100=1,57210, 500=1,31006, 1000=1,12290, 5000=0,99564, 10000=0,97318 (USD)", RoHS=Yes, Stock 1=757, Supplier 1=Digi-Key, Termination=Solder, Voltage Rating=1.25kV, Width=5.08mm
J8 J10: library part M20-7820842, "2.54mm (0.1\") Pitch SIL Vertical PC Tail Socket Assembly, selective gold + tin, 8 contacts", Case/Package=SIL, Color=Black, Contact Resistance=20mR, Manufacturer=Harwin, Max Current Rating=3A, Max Operating Temperature=105°C, Min Operating Temperature=-40°C, Package Quantity=29, Supplier Part Number 1=952-1823-ND, Category="Headers and Wire Housings", ComponentLink1Description=https://datasheet.ciiva.com/16732/m20-782-16732663.pdf?src-supplier=Avnet+Europe, ComponentLink1URL=https://datasheet.ciiva.com/16732/m20-782-16732663.pdf?src-supplier=Avnet+Europe, ComponentLink2Description=https://datasheet.ciiva.com/9480/m20-782-9480074.pdf?src-supplier=Avnet, ComponentLink2URL=https://datasheet.ciiva.com/9480/m20-782-9480074.pdf?src-supplier=Avnet, Connector Type=Receptacle,Socket, Contact Gender=Female, Contact Material=Bronze, Contact Plating=Tin,Gold, Depth=2.5mm, Gender=Female, Housing Color=Black, Housing Material=Polyamide, Length=20.72mm, Manufacturer Part Number=M20-7820842, Mount="Through Hole", Number of Contacts=8, Number of Positions=8, Number of Rows=1, Orientation=Straight, Packaging=Rail/Tube, Pitch=2.54mm, Pricing 1="1=1,10000, 10=0,97200, 100=0,83820, 500=0,68580, 1000=0,60960, 5000=0,53340, 10000=0,50673 (USD)", Radiation Hardening=No, RoHS=Yes, Stock 1=1525, Supplier 1=Digi-Key, Termination=Solder, Weight=0.025397oz
J9: library part M20-7820646, "06-WAY SIL VERT SOCKET L/FREE", Case/Package=SIL, Color=Black, Contact Resistance=20mR, Manufacturer=Harwin, Max Current Rating=3A, Max Operating Temperature=105°C, Min Operating Temperature=-40°C, Package Quantity=38, Supplier Part Number 1=952-1809-ND, Category="Headers and Wire Housings", ComponentLink1Description=http://components.arrow.com/part/dataview/0323_00725884?src-supplier=Arrow+Europe, ComponentLink1URL=http://components.arrow.com/part/dataview/0323_00725884?src-supplier=Arrow+Europe, ComponentLink2Description=http://www.harwin.com/include/downloads/pdfs/2010PAGE120.PDF?src-supplier=Avnet, ComponentLink2URL=http://www.harwin.com/include/downloads/pdfs/2010PAGE120.PDF?src-supplier=Avnet, ComponentLink3Description=https://cdn.harwin.com/pdfs/M20-782.pdf?src-supplier=Digi-Key, ComponentLink3URL=https://cdn.harwin.com/pdfs/M20-782.pdf?src-supplier=Digi-Key, ComponentLink4Description=https://cdn.harwin.com/pdfs/Harwin_PC_Connectors_M20.pdf?src-supplier=Avnet+Europe, ComponentLink4URL=https://cdn.harwin.com/pdfs/Harwin_PC_Connectors_M20.pdf?src-supplier=Avnet+Europe, ComponentLink5Description=https://cdn.harwin.com/pdfs/Harwin_PC_Connectors_M20.pdf?src-supplier=RSComponents, ComponentLink5URL=https://cdn.harwin.com/pdfs/Harwin_PC_Connectors_M20.pdf?src-supplier=RSComponents, ComponentLink6Description=https://cdn.harwin.com/pdfs/Harwin_PC_Connectors_M20.pdf?src-supplier=Mouser, ComponentLink6URL=https://cdn.harwin.com/pdfs/Harwin_PC_Connectors_M20.pdf?src-supplier=Mouser, ComponentLink7Description=https://cdn.harwin.com/pdfs/Harwin_PC_Connectors_M20.pdf?src-supplier=TTI, ComponentLink7URL=https://cdn.harwin.com/pdfs/Harwin_PC_Connectors_M20.pdf?src-supplier=TTI, Connector Type=Receptacle,Socket, Contact Gender=Female, Contact Material=Bronze, Contact Plating=Tin, Depth=2.5mm, Gender=Female, Housing Color=Black, Housing Material=Nylon, Length=15.64mm, Manufacturer Part Number=M20-7820646, Mount="Through Hole", Number of Contacts=6, Number of Positions=6, Number of Rows=1, Orientation=Straight, Packaging=Rail/Tube, Pitch=2.54mm, Pricing 1="1=0,96000, 10=0,84200, 100=0,72600, 500=0,59400, 1000=0,52800, 5000=0,46200, 10000=0,43890 (USD)", Radiation Hardening=No, RoHS=Yes, Stock 1=2220, Supplier 1=Digi-Key, Termination=Solder
JP1 JP3: library part 68000-103HLF, "Conn Unshrouded Header HDR 3 POS 2.54mm Solder ST Thru-Hole Bulk", Color=Black, Current Rating=3A, Flammability Rating="UL94 V-0", Insulation Resistance=5GR, Manufacturer="Amphenol FCI", Max Operating Temperature=125°C, Max Voltage Rating (AC)=1.5kV, Min Operating Temperature=-65°C, Package Quantity=100, Supplier Part Number 1=609-3461-ND, Category="Headers and Wire Housings", ComponentLink1Description=https://datasheet.ciiva.com/5157/68000-274283-5157301.pdf?src-supplier=Mouser, ComponentLink1URL=https://datasheet.ciiva.com/5157/68000-274283-5157301.pdf?src-supplier=Mouser, ComponentLink2Description=https://datasheet.ciiva.com/10149/68000-10149754.pdf?src-supplier=Avnet, ComponentLink2URL=https://datasheet.ciiva.com/10149/68000-10149754.pdf?src-supplier=Avnet, ComponentLink3Description=https://datasheet.ciiva.com/46392/1914865-46392021.pdf?src-supplier=Element14, ComponentLink3URL=https://datasheet.ciiva.com/46392/1914865-46392021.pdf?src-supplier=Element14, Connector Type="Male Pin", Contact Gender=Male, Contact Material=Bronze, Contact Mating Length=5.84mm, Contact Plating=Gold,GXT, Contact Post Length=2.41mm, Depth=2.41mm, Gender=Male, Housing Color=Black, Housing Material=Thermoplastic, Length=7.62mm, Manufacturer Part Number=68000-103HLF, Mount="Through Hole", Number of Contacts=3, Number of Positions=3, Number of Rows=1, Orientation=Straight, Packaging=Bulk, Pitch=2.54mm, Pricing 1="1=0,29000, 10=0,27900, 100=0,19500, 500=0,16716, 1000=0,13930, 5000=0,11940, 10000=0,11144 (USD)", Radiation Hardening=No, REACH SVHC="No SVHC", RoHS=Yes, Stock 1=36438, Supplier 1=Digi-Key, Termination="Through Hole", Voltage Rating=1.5kV
JP2: library part 68001-204HLF, "CONN HEADER VERT 4POS 2.54MM", Color=Black, Current Rating=3A, Flammability Rating="UL94 V-0", Insulation Resistance=5GR, Manufacturer="Amphenol FCI", Max Operating Temperature=125°C, Min Operating Temperature=-65°C, Package Quantity=100, Supplier Part Number 1=609-3402-ND, Voltage Rating=1.5kV, Category="Headers and Wire Housings", ComponentLink1Description=https://datasheet.ciiva.com/5164/68000-274255-5164127.pdf?src-supplier=Mouser, ComponentLink1URL=https://datasheet.ciiva.com/5164/68000-274255-5164127.pdf?src-supplier=Mouser, ComponentLink2Description=https://datasheet.ciiva.com/726/68000-726529.pdf?src-supplier=Digi-Key, ComponentLink2URL=https://datasheet.ciiva.com/726/68000-726529.pdf?src-supplier=Digi-Key, Connector Type="Male Pin", Contact Gender=Male, Contact Material=Bronze, Contact Mating Length=0.23inch, Contact Plating=Gold,GXT, Contact Post Length=3.05mm, Gender=Male, Housing Material=Thermoplastic, Manufacturer Part Number=68001-204HLF, Mount="Through Hole", Number of Contacts=4, Number of Positions=4, Number of Rows=1, Orientation=Straight, Packaging=Bulk, Pitch=2.54mm, Pricing 1="1=0,38000, 10=0,35700, 100=0,25010, 500=0,21442, 1000=0,17868, 5000=0,15315, 10000=0,14294 (USD)", Radiation Hardening=No, RoHS=Yes, Stock 1=2372, Supplier 1=Digi-Key, Termination=Solder
L1: library part L1210R2R2MDWIT, "FIXED IND 2.2UH 2A 80 MOHM SMD", Case Code (Imperial)=1210, Case Code (Metric)=3225, Current Rating=2A, DC Current=1.13A, DC Resistance (DCR)=80mR, Inductance=2.2uH, Inductance Tolerance=20%, Manufacturer=KEMET, Max Operating Temperature=105°C, Min Operating Temperature=-40°C, Package Quantity=1000, Resistor Type=Wirewound,Ceramic, Self Resonant Frequency=190MHz, Supplier Part Number 1=399-9598-1-ND, Test Frequency=100kHz, Case/Package=1210, Category="Fixed Inductors", ComponentLink1Description=https://datasheet.ciiva.com/4957/f3115-4957838.pdf?src-supplier=Mouser, ComponentLink1URL=https://datasheet.ciiva.com/4957/f3115-4957838.pdf?src-supplier=Mouser, ComponentLink2Description=https://datasheet.ciiva.com/6691/f3115-6691487.pdf?src-supplier=Digi-Key, ComponentLink2URL=https://datasheet.ciiva.com/6691/f3115-6691487.pdf?src-supplier=Digi-Key, ComponentLink3Description=https://datasheet.ciiva.com/8512/f3115-8512543.pdf?src-supplier=Avnet, ComponentLink3URL=https://datasheet.ciiva.com/8512/f3115-8512543.pdf?src-supplier=Avnet, ComponentLink4Description=https://datasheet.ciiva.com/17280/f3115-17280270.pdf?src-supplier=Avnet+Europe, ComponentLink4URL=https://datasheet.ciiva.com/17280/f3115-17280270.pdf?src-supplier=Avnet+Europe, ComponentLink5Description=https://datasheet.ciiva.com/22685/27262-22685038.pdf?src-supplier=Element14, ComponentLink5URL=https://datasheet.ciiva.com/22685/27262-22685038.pdf?src-supplier=Element14, Core Material=Ferrite, Depth=2.7mm, Height=2.5mm, Height - Seated (Max)=0.106inch, Length=0.126inch, Manufacturer Part Number=L1210R2R2MDWIT, Max DC Current=2A, Military Standard=Not, Mount="Surface Mount", Packaging="Tape and Reel", Pricing 1="1=0,48000, 10=0,41700, 25=0,38680, 50=0,32720, 100=0,29750, 250=0,27964, 500=0,24990 (USD)", Radiation Hardening=No, REACH SVHC="No SVHC", RoHS=Yes, Shielding=Unshielded, Stock 1=16685, Supplier 1=Digi-Key, Termination=SMD/SMT, Tolerance=20%, Width=0.098inch
MH1 MH2 MH3: library part MH_7.4MM_3.2MM, "Mounting hole 7.4mm diameter 3.4mm drill hole"
MH4: library part MH_7.4_non_plated, "Hole_7.4mm Diameter [Non Copper]_3.2mm Droll NPTH"
R1 R3 R5 R6 R20: library part RC0805FR-07560RL, "Surface Mount Thick Film Resistor, RC Series, 560 ohm, 125 mW, - 1%, 150 V, 0805 [2012 Metric]", Case Code (Imperial)=0805, Case Code (Metric)=2012, Manufacturer=Yageo, Max Operating Temperature=155°C, Max Power Dissipation=125mW, Min Operating Temperature=-55°C, Package Quantity=1, Resistor Type="Thick Film", Supplier Part Number 1=311-560CRCT-ND, Temperature Coefficient=100ppm/°C, Tolerance=1%, Voltage Rating=150V, Case/Package=0805, Category="Chip SMD Resistors", ComponentLink1Description=https://datasheet.ciiva.com/2457/pyu-r-int-thick-7-2457140.pdf?src-supplier=Digi-Key, ComponentLink1URL=https://datasheet.ciiva.com/2457/pyu-r-int-thick-7-2457140.pdf?src-supplier=Digi-Key, ComponentLink2Description=https://datasheet.ciiva.com/2457/pyu-r-int-thick-7-2457141.pdf?src-supplier=Digi-Key, ComponentLink2URL=https://datasheet.ciiva.com/2457/pyu-r-int-thick-7-2457141.pdf?src-supplier=Digi-Key, ComponentLink3Description=https://datasheet.ciiva.com/5561/rc0805-5561861.pdf?src-supplier=Mouser, ComponentLink3URL=https://datasheet.ciiva.com/5561/rc0805-5561861.pdf?src-supplier=Mouser, ComponentLink4Description=https://datasheet.ciiva.com/7941/444164-7941813.pdf?src-supplier=Element14, ComponentLink4URL=https://datasheet.ciiva.com/7941/444164-7941813.pdf?src-supplier=Element14, ComponentLink5Description=https://datasheet.ciiva.com/2457/pyu-r-int-thick-7-2457142.pdf?src-supplier=Digi-Key, ComponentLink5URL=https://datasheet.ciiva.com/2457/pyu-r-int-thick-7-2457142.pdf?src-supplier=Digi-Key, ComponentLink6Description=https://datasheet.ciiva.com/7941/444164-7941814.pdf?src-supplier=Element14, ComponentLink6URL=https://datasheet.ciiva.com/7941/444164-7941814.pdf?src-supplier=Element14, Depth=1.25mm, Features="Moisture Resistant", Height=0.5mm, Lead Free="Lead Free", Length=2mm, Manufacturer Part Number=RC0805FR-07560RL, Military Standard=Not, Number of Terminations=2, Packaging="Tape and Reel", Power Rating=125mW, Pricing 1="1=0,10000, 10=0,03600, 100=0,01470, 1000=0,00660, 2500=0,00573 (USD)", REACH SVHC=Unknown, Resistance=560R, RoHS=Yes, Supplier 1=Digi-Key, Termination=SMD/SMT, Weight=0.000194oz, Width=0.049inch